# Altium PCB MT3608.PcbDoc
Units mil, origin at the board's own origin, x right, y up, seen from the top; angles counter-clockwise.
Board outline 4190 x 2885 mil, 2 copper layers (Top Layer, Bottom Layer); 45 components, 30 nets, 129 pads, 0 vias.
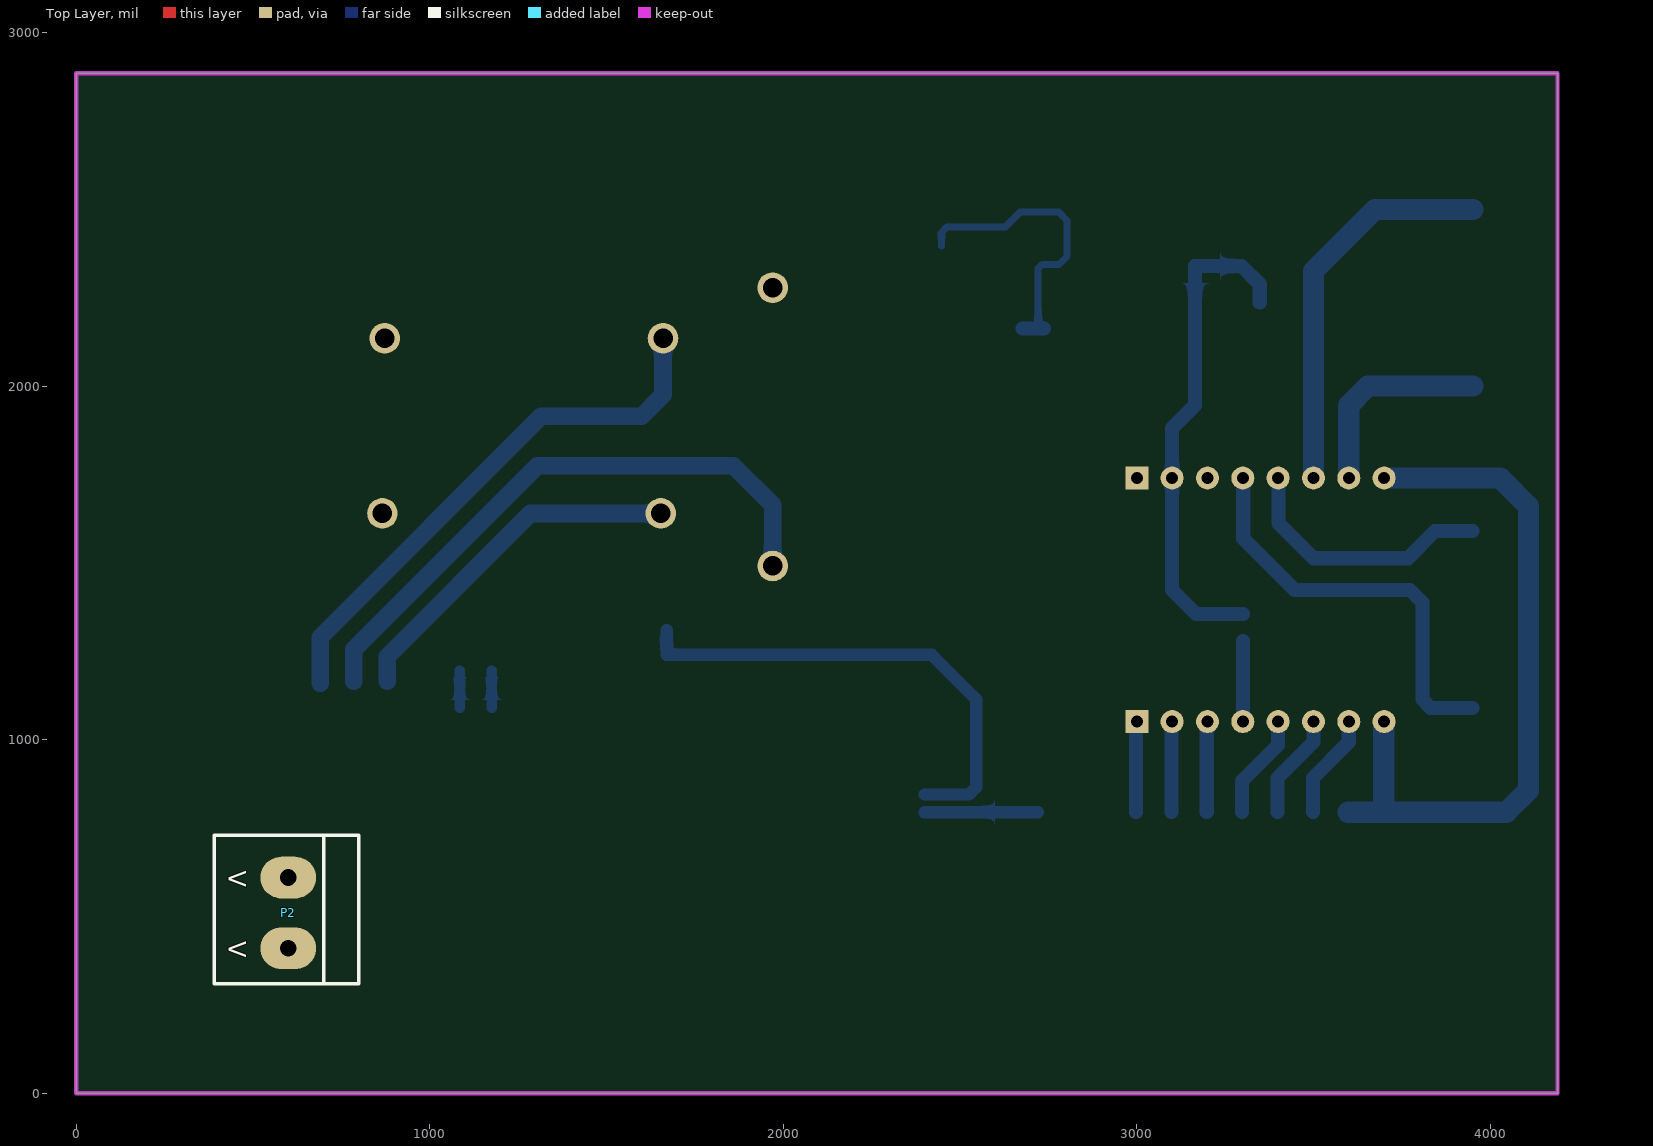
[diagram p0: Top Layer view]
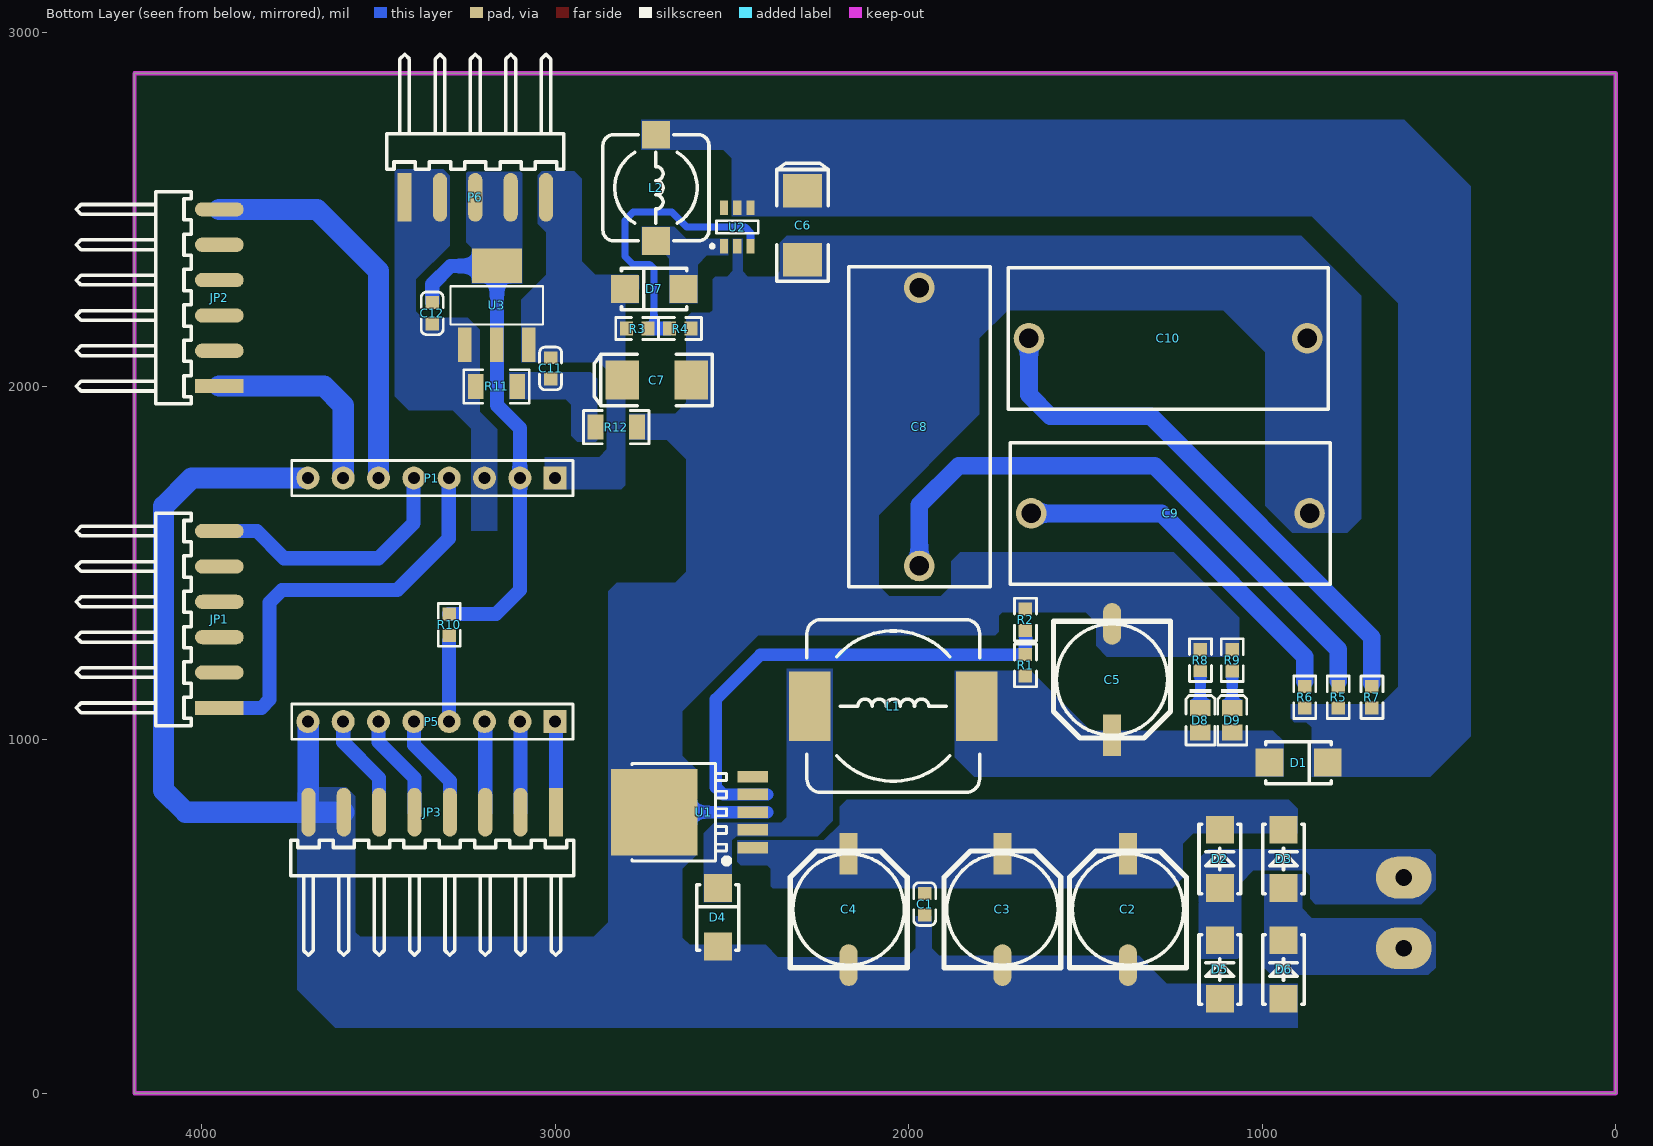
[diagram p1: Bottom Layer view, seen from below]

## Layer stack, top to bottom
Top Solder: solder mask 0.4, Solder Resist, Dk 3.5
Top Layer: signal copper 1.4
Dielectric 1: dielectric 12.6, FR-4, Dk 4.8
Bottom Layer: signal copper 1.4
Bottom Solder: solder mask 0.4, Solder Resist, Dk 3.5

## Board outline
0,0 4190,0 4190,2885 0,2885

## Design rules (kind name [scope] priority, off if disabled: settings)
Clearance [All] p1: gap=10 ignorepadtopadclearanceinfootprint=FALSE except(0: Arc-Hole Track-Hole SMDPad-Hole THPad-Hole Via-Hole Fill-Hole Poly-Hole Region-Hole Text-Hole; 5: Arc-Arc Arc-Track Arc-SMDPad Track-Track Track-SMDPad SMDPad-SMDPad)
PolygonConnect [All] p1: connectstyle=Direct reliefconductorwidth=10 reliefentries=4 polygonreliefangle="90 Angle" airgapwidth=10
RoutingVias [All] p1: holewidth=28 width=50 viastyle="Through Hole" minholewidth=28 minwidth=50 maxholewidth=28 maxwidth=50
SolderMaskExpansion [All] p1: expansion=4 istentingtop=FALSE
Width [All] p1: maxlimit=300 minlimit=10 preferedwidth=10 minimp=50.000000 maximp=50.000000 favimp=50.000000
30 further rules are at their usual default settings.

## Components (designator, comment, footprint, x,y, rotation, side; value= is the part's Value field where it differs from the comment)
C1 "?F" 0603_C 1955,535 r90 bottom
C2 "100uF" "CM E(8*10.2)" 1380,520 r90 bottom
C3 "100uF" "CM E(8*10.2)" 1735,520 r90 bottom
C4 "100uF" "CM E(8*10.2)" 2170,520 r90 bottom
C5 "100uF" "CM E(8*10.2)" 1425,1170 r270 bottom
C6 "22uF" CASE-C_6032 2300,2455 r90 bottom
C7 "22uF" CASE-C_6032 2713,2017 r0 bottom
C8 "2uF" CAP-TH_L23.0-W10.0-P20.00-D1.4 1970,1885 r270 bottom
C9 "2uF" CAP-TH_L23.0-W10.0-P20.00-D1.4 1260,1640 r0 bottom
C10 "2uF" CAP-TH_L23.0-W10.0-P20.00-D1.4 1266.3,2135 r0 bottom
C11 "0.1uF" 0603_C 3013,2050 r90 bottom
C12 "0.1uF" 0603_C 3348,2206 r90 bottom
D1 "Diode" SMA(DO-214AC)_S1 897.32,935 r0 bottom
D2 "Diode" SMA(DO-214AC)_S2 1120,662.68 r270 bottom
D3 "Diode" SMA(DO-214AC)_S2 940,662.68 r270 bottom
D4 "Diode" SMA(DO-214AC)_S1 2540,497.32 r270 bottom
D5 "Diode" SMA(DO-214AC)_S2 1120,350 r270 bottom
D6 "Diode" SMA(DO-214AC)_S2 940,350 r270 bottom
D7 "Diode" SMA(DO-214AC)_S1 2720,2275 r180 bottom
D8 "LED" 0805_LED 1175,1054.96 r270 bottom
D9 "LED" 0805_LED 1085,1055 r270 bottom
JP1 "HDR-1X6" HDR2.54-WS-6P 3950,1340 r90 bottom
JP2 "HDR-1X6" HDR2.54-WS-6P 3950,2250 r90 bottom
JP3 "HDR-1X8" HDR2.54-WS-8P 3348,795 r0 bottom
L1 "100uH" CDRH127 2043.78,1095 r180 bottom
L2 "10uH" CDRH73 2715,2561 r270 bottom
P1 "Header 8" "Header 8" 3300,1740 r270 bottom
P2 "2PIN" KF128-2P 599.06,615.28 r270 top
P5 "Header 8" "Header 8" 3300,1051.02 r270 bottom
P6 "Header 5" HDR2.54-WS-5P 3226,2534 r180 bottom
R1 "10kΩ" 0603_R 1670,1210 r270 bottom
R2 "3.3kΩ" 0603_R 1670,1339.69 r270 bottom
R3 "16kΩ" 0603_R 2768.31,2163 r0 bottom
R4 "2.2kΩ" 0603_R 2646.68,2163 r0 bottom
R5 "5Ω" 0603_R 785,1120 r270 bottom
R6 "5Ω" 0603_R 880,1120 r270 bottom
R7 "5Ω" 0603_R 690,1120 r270 bottom
R8 "1kΩ" 0603_R 1175,1225.28 r270 bottom
R9 "1kΩ" 0603_R 1085,1225 r270 bottom
R10 "1kΩ" 0603_R 3300,1325 r90 bottom
R11 "0Ω" 1206_R 3166,1999 r180 bottom
R12 "0Ω" 1206_R 2827.34,1884 r0 bottom
U1 "DCDC" TO-252-XL 2580.5,795 r0 bottom
U2 "DCDCLowPower" SOT95P290X145-6N 2485,2450 r90 bottom
U3 "AMS1117-3.3_C369933" SOT-223-4_L6.5-W3.5-P2.30-LS7.0-BR 3165,2228.39 r270 bottom

## Footprints (in the part's own frame and the unit in brackets; to place one, negate y for a bottom-side part, rotate by r counter-clockwise, add the part's x,y. Pads: shape width x height; smd on the part's side, far side on the other; paste and mask are expansions set on the pad)
0603_C [mm]
  rect 0.93x0.98 smd: 1(-0.77,0) 2(0.77,0)
  silkscreen extent -1.53,-0.79 1.54,0.79, body extent -0.8,-0.4 0.8,0.4, height 0.3
0603_R [mm]
  rect 0.93x0.98 smd: 1(-0.77,0) 2(0.77,0)
  silkscreen extent -1.53,-0.79 1.54,0.79, body extent -0.85,-0.4 0.85,0.4, height 0.56
0805_LED [mm]
  rect 1.16x1.47 smd: A(0.89,0) K(-0.89,0)
  silkscreen extent -2.25,-1.04 1.77,1.03, body extent -1.01,-0.63 1.01,0.62, height 1.1
1206_R [mm]
  rect 1.13x1.8 smd: 1(-1.49,0) 2(1.49,0)
  silkscreen extent -2.36,-1.2 2.35,1.2, body extent -1.7,-0.86 1.65,0.87, height 0.85
CAP-TH_L23.0-W10.0-P20.00-D1.4 [mm]
  round 2.2 hole 1.4: 1(-10,0) 2(10,0)
  silkscreen extent -11.5,-5.08 11.5,5.08
CASE-C_6032 [mm]
  rect 2.4x2.8 smd: 1(2.48,0) 2(-2.48,0)
  silkscreen extent -4.01,-1.85 4.47,1.85, body extent -3.05,-1.68 3.05,1.67, height 2.7
CDRH73 [mm] "7.3*7.3*3.4mm（长宽高）"
  rect 2x2 smd: 1(-3.81,0) 2(3.81,0)
  silkscreen extent -3.81,-3.81 3.81,3.81, body extent -3.65,-3.65 3.65,3.65, height 3.65
CDRH127 [mm] "12*12*8mm（长宽高）"
  rect 3x5 smd: 1(-6,0) 2(6,0)
  silkscreen extent -6.2,-6.2 6.2,6.2, body extent -6,-6 6,6, height 7.8
"CM E(8*10.2)" [mm] "贴片电解电容，直径8mm，高10.2mm        淘宝ID:黄晶宝石"
  rect 3x1.3 smd: 1(4,0)
  oval 3x1.3 smd: 2(-4,0)
  silkscreen extent -4.2,-4.2 4.2,4.2, body extent -4.5,-4.15 4.5,4.15, height 10.2
HDR2.54-WS-5P [mm] "5P卧式贴片排针2.54"
  rect 1.02x3.5 smd: 1(-5.08,0)
  oval 1.02x3.5 smd: 2(-2.54,0) 3(0,0) 4(2.54,0) 5(5.08,0)
  silkscreen extent -6.35,2.03 6.35,10.29, body extent -6.35,-0.76 6.35,10.34, height 2.54
HDR2.54-WS-6P [mm] "6P卧式贴片排针2.54"
  rect 1.02x3.5 smd: 1(-6.35,0)
  oval 1.02x3.5 smd: 2(-3.81,0) 3(-1.27,0) 4(1.27,0) 5(3.81,0) 6(6.35,0)
  silkscreen extent -7.62,2.03 7.62,10.29, body extent -7.62,-0.76 7.62,10.34, height 2.54
HDR2.54-WS-8P [mm] "8P卧式贴片排针2.54"
  rect 1.02x3.5 smd: 1(-8.89,0)
  oval 1.02x3.5 smd: 2(-6.35,0) 3(-3.81,0) 4(-1.27,0) 5(1.27,0) 6(3.81,0) 7(6.35,0) 8(8.89,0)
  silkscreen extent -10.16,2.03 10.16,10.29, body extent -10.16,-0.76 10.16,10.34, height 2.54
"Header 8" [mil]
  rect 65x65 hole 34: 1(0,300)
  round 65 hole 34: 2(0,200) 3(0,100) 4(0,0) 5(0,-99.8) 6(0,-199.8) 8(0,-399.61)
  round 65 hole 34 paste-99999: 7(0,-299.61)
  silkscreen extent -50,-445 50,350, body extent -49,-451 51,349, height 336
KF128-2P [mm]
  oval 3x4 hole 1.2: 1(0.134,0.024) 2(5.214,0.024)
  silkscreen extent -2.91,-5.28 7.75,5.1, body extent -2.91,-5.35 7.75,5.15, height 14.15
SMA(DO-214AC)_S1 [mm]
  rect 2x2 smd: 1(2.1,0) 2(-2.1,0)
  silkscreen extent -2.35,-1.5 2.35,1.5
SMA(DO-214AC)_S2 [mm]
  rect 2x2 smd: 1(2.1,0) 2(-2.1,0)
  silkscreen extent -2.5,-1.5 2.5,1.5, body extent -2.6,-1.3 2.6,1.3, height 2.4
SOT95P290X145-6N [mm] "SOT23, 6-Leads, Body 2.90x2.90mm, Pitch 0.95mm, IPC Medium Density"
  rect 1.05x0.6 smd: 1(-1.375,0.95) 2(-1.375,0) 3(-1.375,-0.95) 4(1.375,-0.95) 5(1.375,0) 6(1.375,0.95)
  silkscreen extent -1.5,-1.5 0.45,1.93, body extent -1.5,-1.5 1.5,1.5, height 1.45
SOT-223-4_L6.5-W3.5-P2.30-LS7.0-BR [mm]
  rect 2.47x0.98 smd: 1(2.835,-2.3) 2(2.835,0) 3(2.835,2.3)
  rect 2.47x3.6 smd: 4(-2.835,0)
  silkscreen extent -1.37,-3.33 1.37,3.33, body extent -3.32,-3.25 3.68,3.25, height 1.87
TO-252-XL [mil]
  rect 86.61x32.5 smd: 1(-139.5,100) 2(-139.5,50) 3(-139.5,0) 4(-139.5,-50) 5(-139.5,-100)
  rect 244.5x244.5 smd: 6(139.5,0)
  silkscreen extent -73,-138 202,146, body extent -179,-132 249,132, height 94

## Part data
C1 C11 C12: library part SMT_Cap, "贴片电容", Package=0805, SuppliersPartNumber=C28260, ComponentLink1Description=供应商链接, ComponentLink1URL=http://www.szlcsc.com/product/details_29010.html, Supplier=LC
C2 C3 C4 C5: library part SMT_Cap_Electrolytic, "贴片电容", Package=0805, SuppliersPartNumber=C28260, ComponentLink1Description=供应商链接, ComponentLink1URL=http://www.szlcsc.com/product/details_29010.html, Supplier=LC
C6 C7: library part SMT_Cap_Tantalum, "钽电容", Package=3528, SuppliersPartNumber=C16133, ComponentLink1Description=供应商链接, ComponentLink1URL=http://www.szlcsc.com/product/details_16815.html, Supplier=LC
C8 C9 C10: library part 2uF-CBB, "CBB，2uF电容", BOM_JLCPCB Part Class="Extended Part", BOM_Manufacturer=SRD, BOM_Manufacturer Part=MPP205J4241119LC, BOM_Supplier=LCSC, BOM_Supplier Part=C93266, nameAlias=Capacitance, spicePre=C, spiceSymbolName=MPP205J4241119LC
D1 D2 D3 D4 D5 D6 D7: "通用二极管", Package=SOD-123, SuppliersPartNumber=C8598, ComponentLink1Description=供应商链接, ComponentLink1URL=http://www.szlcsc.com/product/details_9093.html, Supplier=LC
D8 D9: "发光二极管", Package=0603, SuppliersPartNumber=C2290, ComponentLink1Description=供应商链接, ComponentLink1URL=http://www.szlcsc.com/product/details_2663.html, Supplier=LC
JP1 JP2: library part "Header 6", "6P接插件", BOM名称=6P接插件, 封装库来自淘宝卖家  ID：黄晶宝石=其他店铺购入均为盗版假冒封装库，请立即申请退款, 技术支持， 联系售后=唯一出售店铺网址https://shop463601444.taobao.com
JP3: library part "Header 8", "8P接插件", BOM名称=8P接插件, 封装库来自淘宝卖家  ID：黄晶宝石=其他店铺购入均为盗版假冒封装库，请立即申请退款, 技术支持， 联系售后=唯一出售店铺网址https://shop463601444.taobao.com
L1 L2: library part SMT_Iud_Power, "功率电感", Package=0603, SuppliersPartNumber=C29258, ComponentLink1Description=供应商链接, ComponentLink1URL=http://www.szlcsc.com/product/details_30010.html, Supplier=LC
P1 P5 P6: "排针"
P2: library part 接线端子-2PIN
R1 R2 R3 R4 R5 R6 R7 R8 R9 R10 R11 R12: library part SMT_Res, "贴片电阻", Package=0603, SuppliersPartNumber=C23253, ComponentLink1Description=供应商链接, ComponentLink1URL=http://www.szlcsc.com/product/details_23980.html, Supplier=LC
U1: library part XL7015, "宽输入DCDC升降压管理芯片（Buck）"
U2: library part MT3608, "The MT3608 is a constant frequency, 6-pin SOT23  / current mode step-up converter intended for small,  / low power applications. The MT3608 switches at  / 1.2MHz and allows the use of tiny, low cost  / capacitors and inductors 2mm or less in height.  / Internal soft-start results in small inrush current and  / extends battery life. / The MT3608 features automatic shifting to pulse  / frequency modulation mode at light loads. The  / MT3608 includes under-voltage lockout, current  / limiting, and thermal overload protection to prevent  / damage in the event of an output overload. The  / MT3608 is available in a small 6-pin SOT-23  / package"
U3: BOM_JLCPCB Part Class="Extended Part", BOM_Manufacturer=KEXIN, BOM_Manufacturer Part=AMS1117-3.3, BOM_Supplier=LCSC, BOM_Supplier Part=C369933, Contributor=LCSC, spicePre=U, spiceSymbolName=AMS1117-3.3_C369933

## Nets (pads, with @x,y where several pads share a name; then routed paths per layer and width w, separated by ;. In a path a pad name is that pad's centre, name@x,y a point inside that pad or via, vN(x,y) a via of type N, cw(c..) or ccw(c..) an arc to the next point about the centre after c; other vN are vias at no path point)
+3V3: C12.2 P1.2 P6.3 P6.4 R10.2 U3.2 U3.4 | length 1428.2
  Bottom Layer w40: R10.2 3167.68,1355.32 3100,1423 P1.2 3100,1881 3165,1946 U3.2 U3.4 3296,2340 3348,2288 C12.2
+5in: C5.1 D1.1 D8.A D9.A L1.2 R1.2
+5out: C7.1 C11.2 D7.2 P1.1 P6.5 R3.2 U3.3
AIN1: JP3.3 P5.3 | length 254
  Bottom Layer w40: JP3.3 P5.3@3198,1049.02
AIN2: JP3.2 P5.2 | length 254
  Bottom Layer w40: JP3.2 P5.2@3098,1049.02
AO1: JP1.1 P1.4 | length 1179.6
  Bottom Layer w40: P1.4 3300.96,1739.04 3300.96,1569.03 3446.98,1423 3772.53,1423 3807.68,1387.85 3807.68,1113.43 3831.11,1090 JP1.1
AO2: JP1.6 P1.5 | length 750.4
  Bottom Layer w40: P1.5 3400.76,1739.04 3400.76,1612.24 3500,1513 3767,1513 3844,1590 JP1.6
BIN1: JP3.4 P5.5 | length 296.8
  Bottom Layer w40: JP3.4 3298,883 3399.8,984.8 P5.5@3399.8,1049.67
BIN2: JP3.5 P5.6 | length 298.2
  Bottom Layer w40: JP3.5 3398,892 3499.8,993.8 P5.6
BO1: JP2.1 P1.7 | length 578.5
  Bottom Layer w60: P1.7 3599.61,1945.61 3654,2000 JP2.1
BO2: JP2.6 P1.6 | length 1106.8
  Bottom Layer w60: P1.6@3499.8,1741.35 3499.8,2325.8 3674,2500 JP2.6
CAP_IN: C6.1 D1.2 L2.1 R5.2 R6.2 R7.2 U2.4 U2.5
DGND: C12.1 P1.3 P6.1 P6.2 R11.1 U3.1
FB: R1.1 R2.2 U1.4 | length 1400
  Bottom Layer w35: R2.2 R1.1 2419.69,1240.31 2545.95,1114.05 2545.95,865.95 2525,845 U1.4 U1.4@2400,845
GND: C1.1 C2.2 C3.2 C4.2 C5.2 C6.2 C7.2 C8.1 C9.1 C10.1 D4.1 D5.1 D6.1 JP3.7 JP3.8 P1.8 P5.8 R2.1 R4.1 R8.1 R9.1 R12.1 U1.3 U1.6 U2.2 | length 2356.9
  Bottom Layer w35: U1.3@2400,795 U1.3 U1.6
  Bottom Layer w60: JP3.7 JP3.8 ; P5.8 3698.8,1050.22 3698.8,795.8 JP3.8 ; P1.8 4028,1740 4108,1660 4108,857 4046,795 JP3.8
NetC1_2: C1.2 C2.1 C3.1 C4.1 D2.2 D3.2 U1.1
NetC8_2: C8.2 R5.1 | length 1709
  Bottom Layer w50: R5.1@785,1165 785,1255 1305,1775 1858.82,1775 1970,1663.82 C8.2
NetC9_2: C9.2 R6.1 | length 1011.5
  Bottom Layer w50: R6.1@880,1165 880,1235 1285,1640 C9.2
NetC10_2: C10.2 R7.1 | length 1543.5
  Bottom Layer w50: R7.1@690,1160 690,1290 1315,1915 1599.62,1915 1660,1975.38 C10.2
NetC11_1: C11.1 R11.2 R12.2
NetD2_1: D2.1 D5.2 P2.1
NetD3_1: D3.1 D6.2 P2.2
NetD4_2: D4.2 L1.1 U1.2
NetD7_1: D7.1 L2.2 U2.1
NetD8_K: D8.K R8.2 | length 105
  Bottom Layer w30: D8.K R8.2
NetD9_K: D9.K R9.2 | length 104.6
  Bottom Layer w30: D9.K R9.2
NetR3_1: R3.1 R4.2 U2.3 | length 856.3
  Bottom Layer w20: U2.3 2447.6,2435 2462.6,2450 2628,2450 2670,2492 2780,2492 2803,2469 2803,2367 2780,2344 2732.72,2344 2721,2332.28 R3.1@2721,2163
  Bottom Layer w40: R4.2 2721,2163 R3.1
PWMA: JP3.1 P5.1 | length 256.9
  Bottom Layer w40: JP3.1 2998,1049.02 P5.1
PWMB: JP3.6 P5.7 | length 298.1
  Bottom Layer w40: JP3.6 3498,892 3599.61,993.61 P5.7
STBY: P5.4 R10.1 | length 228
  Bottom Layer w40: P5.4 R10.1@3300,1279
pads on no net: JP1.2 JP1.3 JP1.4 JP1.5 JP2.2 JP2.3 JP2.4 JP2.5 U1.5 U2.6

## Polygon pours and split planes (outlines as drawn)
DGND on Bottom Layer "DGND_L02_P024" (solid, pour order 24): 3317,2614 3298,2595 3298,2573.26 3298.31,2572.95 3298.31,2397.69 3394,2302 3394,2212 3376,2194 3248,2194 3213,2159 3213,1927 3164,1878 3164,1591 3237,1591 3237,1879 3290,1932 3414,1932 3454,1972 3454,2607 3447,2614
GND on Bottom Layer "Bottom Layer-GND" (solid, pour order 14): 2850,483 2891,442 3551,442 3565,456 3565,840 3591,866 3712,866 3730,848 3730,293 3622,185 900,185 900,310 1270,310 1348.56,388.56 1913.56,388.56 1935,410 1935,500 1980,500 1980,410 2005,385 2370,385 2405,420 2620,420 2640,440 2640,635 2600,675 2600,915 2640,955 2640,1080 2425,1295 1755,1295 1745,1305 1745,1350 1735,1360 1500,1360 1470,1330 1470,1265 1440,1235 1065,1235 1065,1345 1250,1530 1855,1530 1880,1505 1880,1435.01 1910.01,1405 2055,1405 2085,1435 2085,1635 1800,1920 1800,2135 1720,2215 1110,2215 991.43,2096.43 991.43,1661.43 915,1585 760,1585 720,1625 720,2255 890,2425 2345,2425 2365,2405 2365,2325 2380,2310 2455,2310 2470,2325 2470,2417 2498,2417 2498,2326 2514,2310 2547,2310 2555,2302 2555,2215 2563,2207 2615,2207 2629,2193 2629,1954 2661,1922 2791,1922 2791,1848 2684,1848 2629,1793 2629,1475 2659,1445 2825.5,1444.5 2850,1420
+3V3 on Bottom Layer "+3V3_L02_P020" (solid, pour order 20): 3093,2602 3098,2607 3248,2607 3251,2604 3251,2406.58 3236,2391.58 3236,2289 3093,2289
+5out on Bottom Layer "+5OUT_L02_P016" (solid, pour order 16): 2887,2315 2925,2353 2925,2438 2925,2586 2946.47,2607.47 3038.53,2607.47 3050,2596 3050,2459 3026,2435 3026,2315 3096,2245 3096,2068 2875,2068 2854,2047 2854,1821 2876,1799 3029,1799 3029,1708 2813,1708 2802,1719 2802,2235 2763.1,2235 2763,2315
NetC11_1 on Bottom Layer "NETC11_1_L02_P018" (solid, pour order 18): 2899,2039 2881,2021 2881,1847 2885,1843 2937,1843 2954,1860 2954,1947 2970,1963 3130,1963 3130,2039
NetD7_1 on Bottom Layer "NETD7_1_L02_P015" (solid, pour order 15): 2571,2370 2597,2344 2597,2235 2677,2235 2677,2361 2688,2372 2755,2372 2755,2451 2663,2451 2629,2417 2510,2417 2510,2370
CAP_IN on Bottom Layer "Bottom Layer-CAP_IN" (solid, pour order 12): 2525,2669 2756,2669 2756,2753 598,2753 410,2565 410,1010 525,895 685,895 860,895 860,960 860,1035 875,1050 910,1050 920,1060 920,1100 665,1100 615,1150 615,2235 860,2480 2500,2480 2500,2644
+5in on Bottom Layer "+5IN_L02_P005" (solid, pour order 5): 940,995 970,1025 1485,1025 1655,1195 1870,1195 1870,950 1815,895 940,895
NetC1_2 on Bottom Layer "NETC1_2_L02_P002" (solid, pour order 2): 2175,830 2195,810 2195,760 2240,715 2350,715 2485,715 2485,655 2475,645 2400,645 2390,635 2390,585 2385,580 1255,580 1225,610 1225,705 1195,735 900,735 900,805 925,830
NetD4_2 on Bottom Layer "NETD4_2_L02_P003" (solid, pour order 3): 2258.06,726.94 2215,770 2215,1200 2345,1200 2345,780 2360,765 2550,765 2580,735 2580,540 2500,540 2500,715 2488.06,726.94
NetD3_1 on Bottom Layer "NETD3_1_L02_P001" (solid, pour order 1): 995,355 975,335 530,335 510,355 510,455 550,495 860,495 887.5,522.5 887.5,620 995,620
NetD2_1 on Bottom Layer "NETD2_1_L02_P000" (solid, pour order 0): 510,675 525,690 1153.55,690 1180,663.55 1180,539.86 1178.58,538.44 1180,537.02 1180,385 1175,380 1070,380 1060,390 1060,595 1025,630 880,630 865,615 865,550 850,535 550,535 510,575

## Keep-outs
Keep-Out Layer:
  the board outline again, w11.81

## Text inside footprints (layer, text, board x,y; h text height)
P2: Top Overlay "V" at 431.93,628.94 h50 r270; Top Overlay "V" at 431.93,430 h50 r270